# Altium PCB Controller-Board-Rev3.PcbDoc
Units mm, origin at the board's own origin, x right, y up, seen from the top; angles counter-clockwise.
Board outline 35 x 30 mm, 4 copper layers (Component Side, Ground Plane, Power Plane, Solder Side), stack 0.844 mm thick; 56 components, 57 nets, 246 pads, 90 vias.
Unrouted connection lines stored in the file: 3.
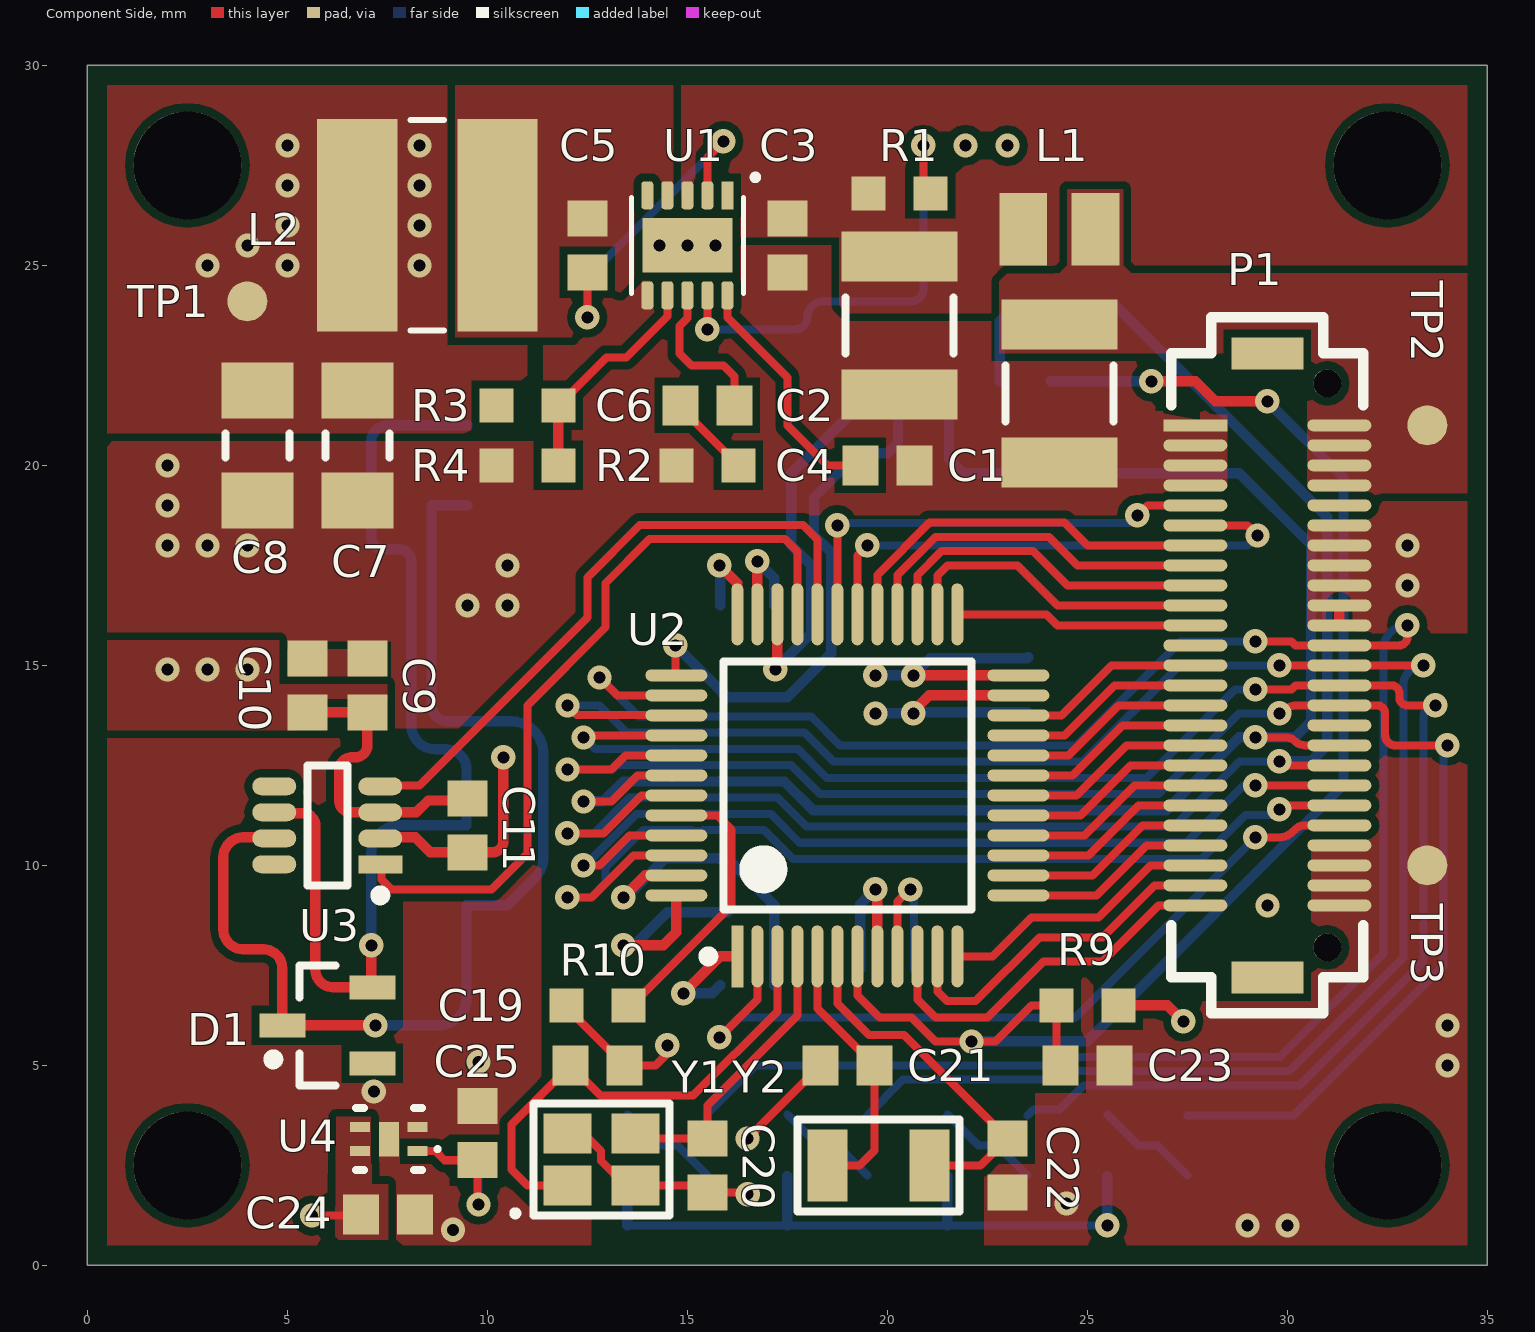
[diagram p0: Component Side view]
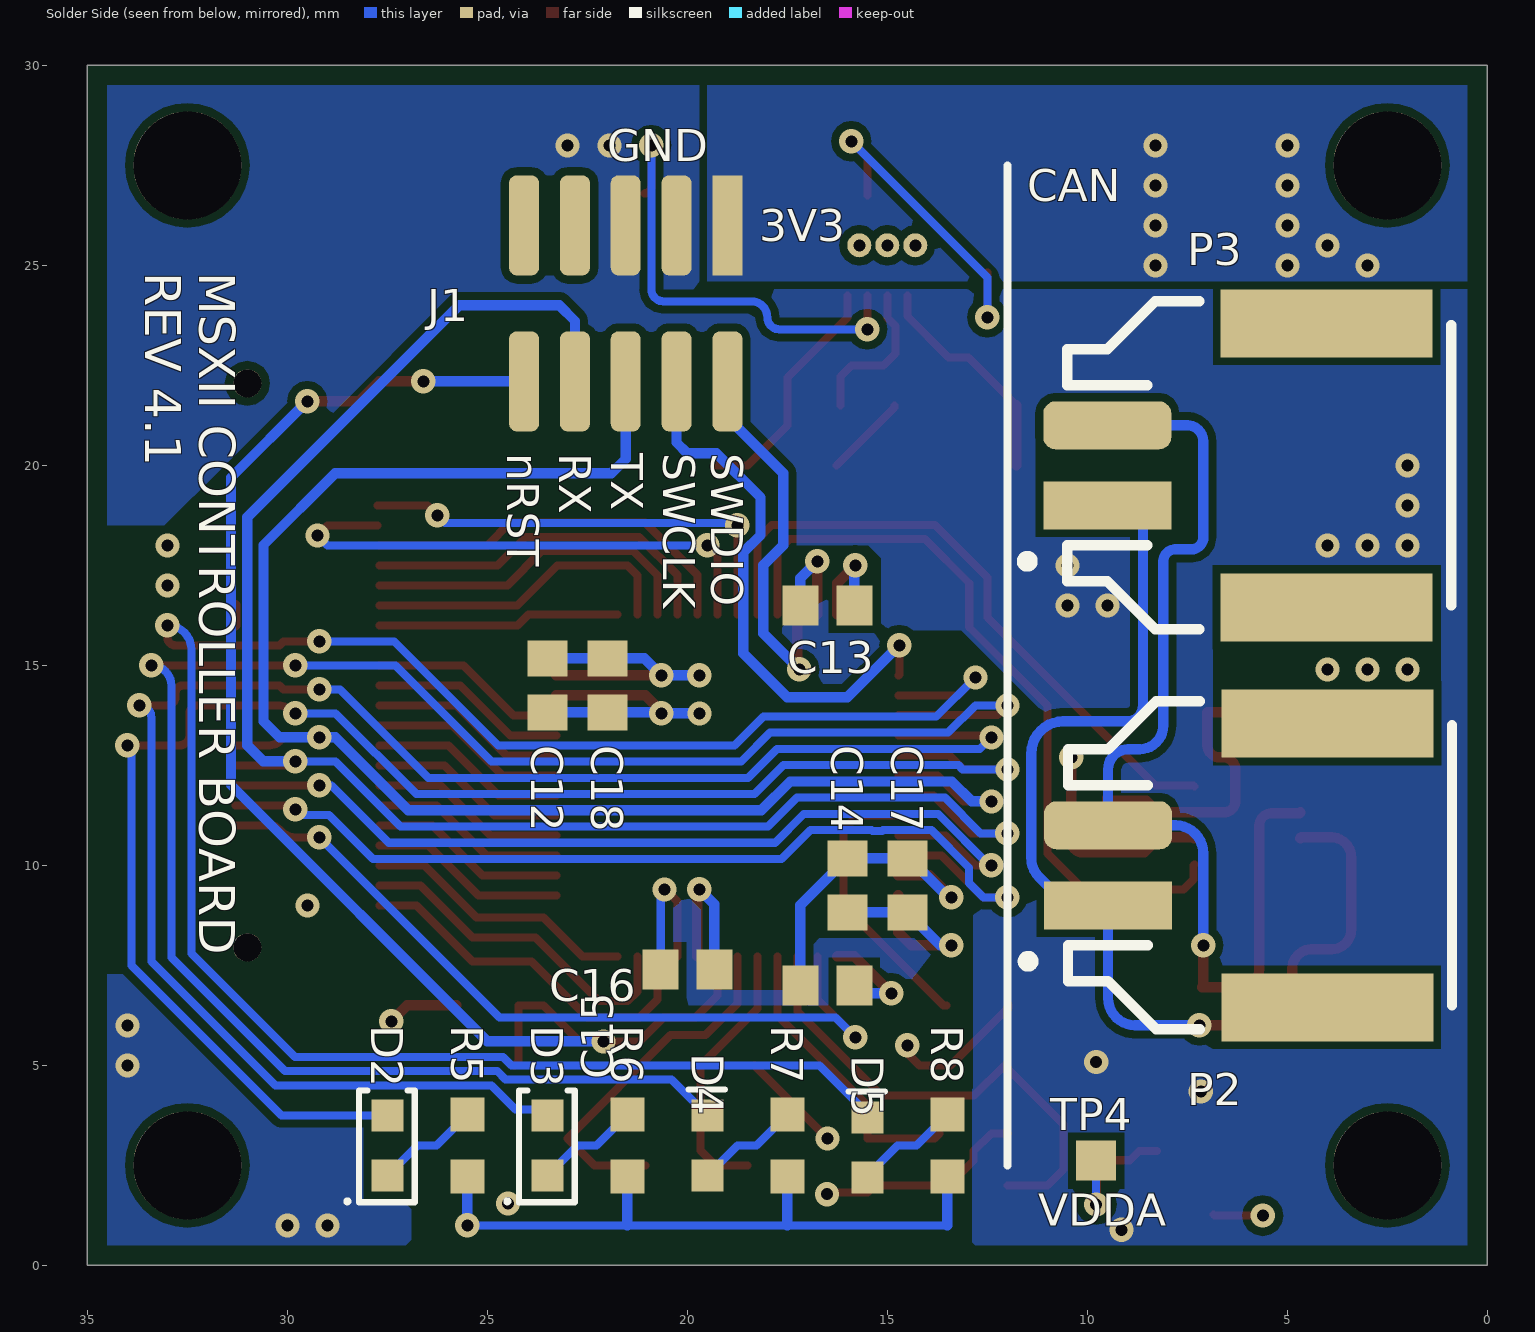
[diagram p1: Solder Side view, seen from below]
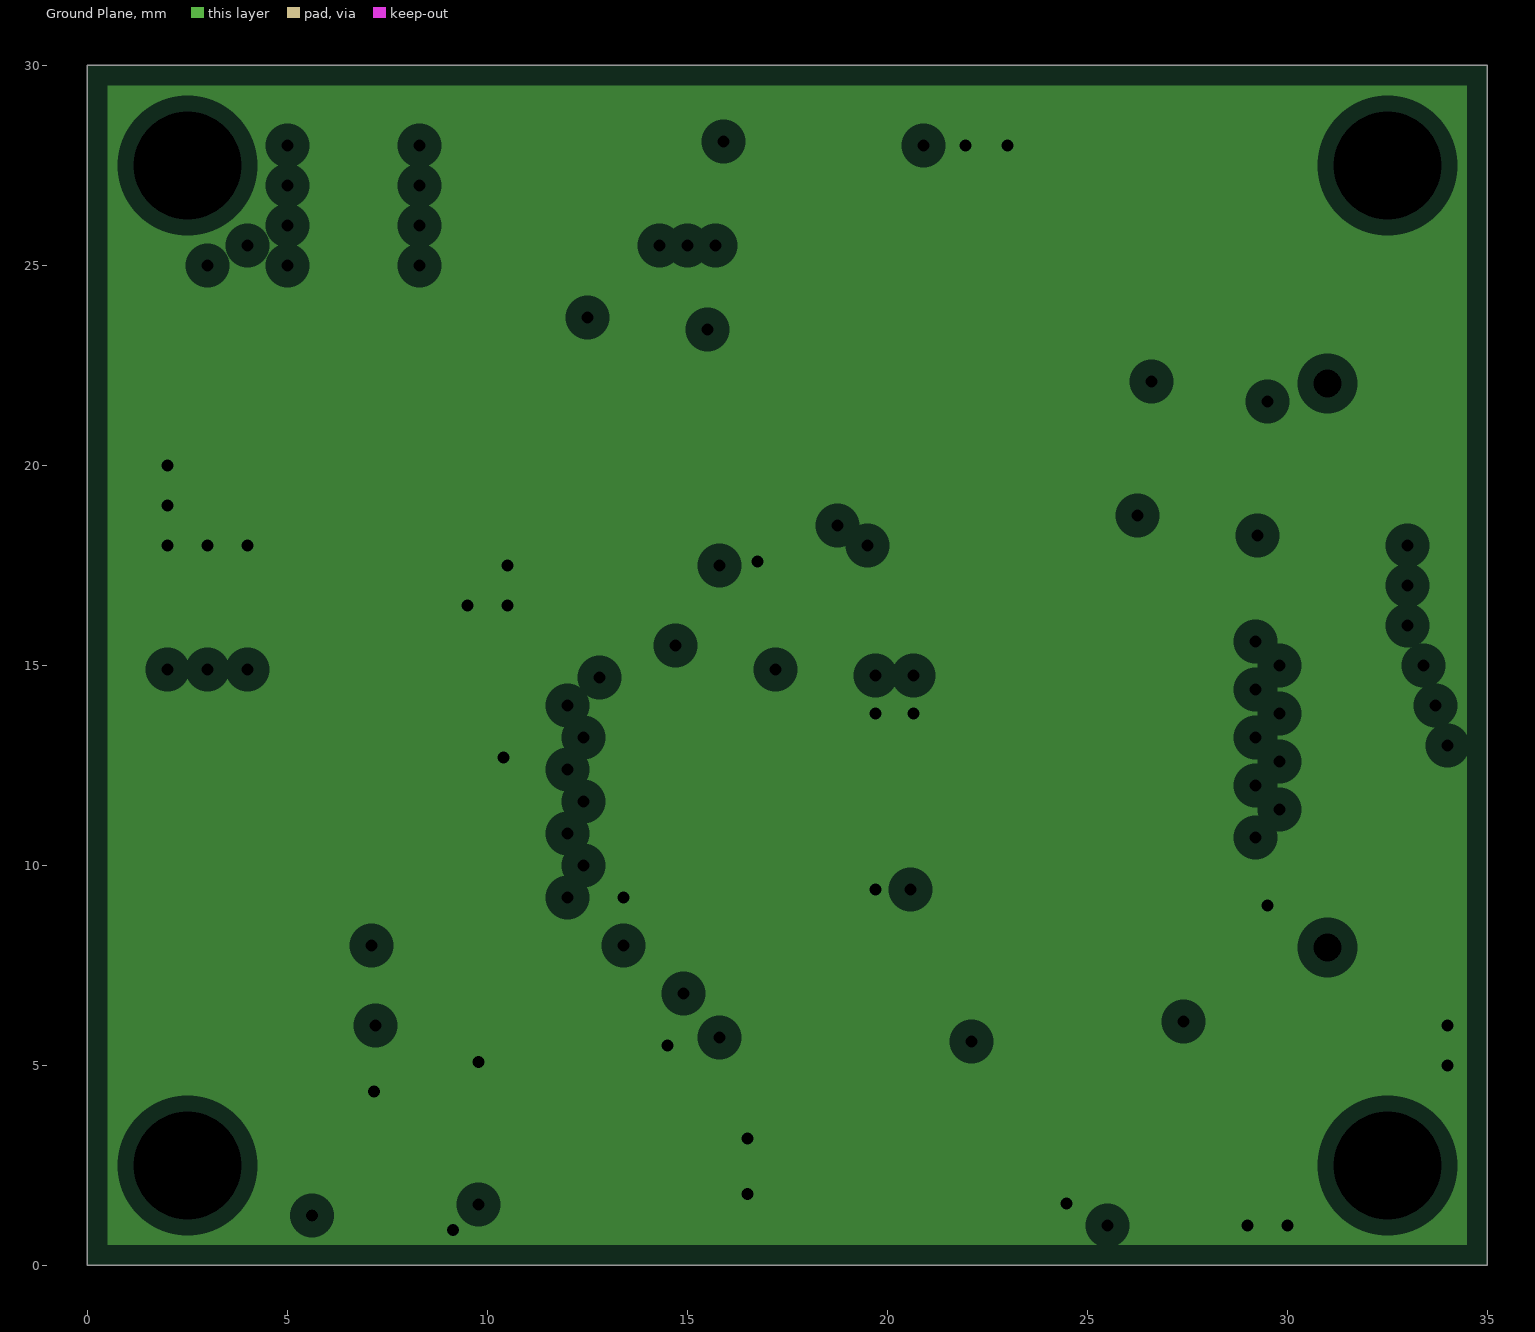
[diagram p2: Ground Plane, clearances drawn from the general rule]
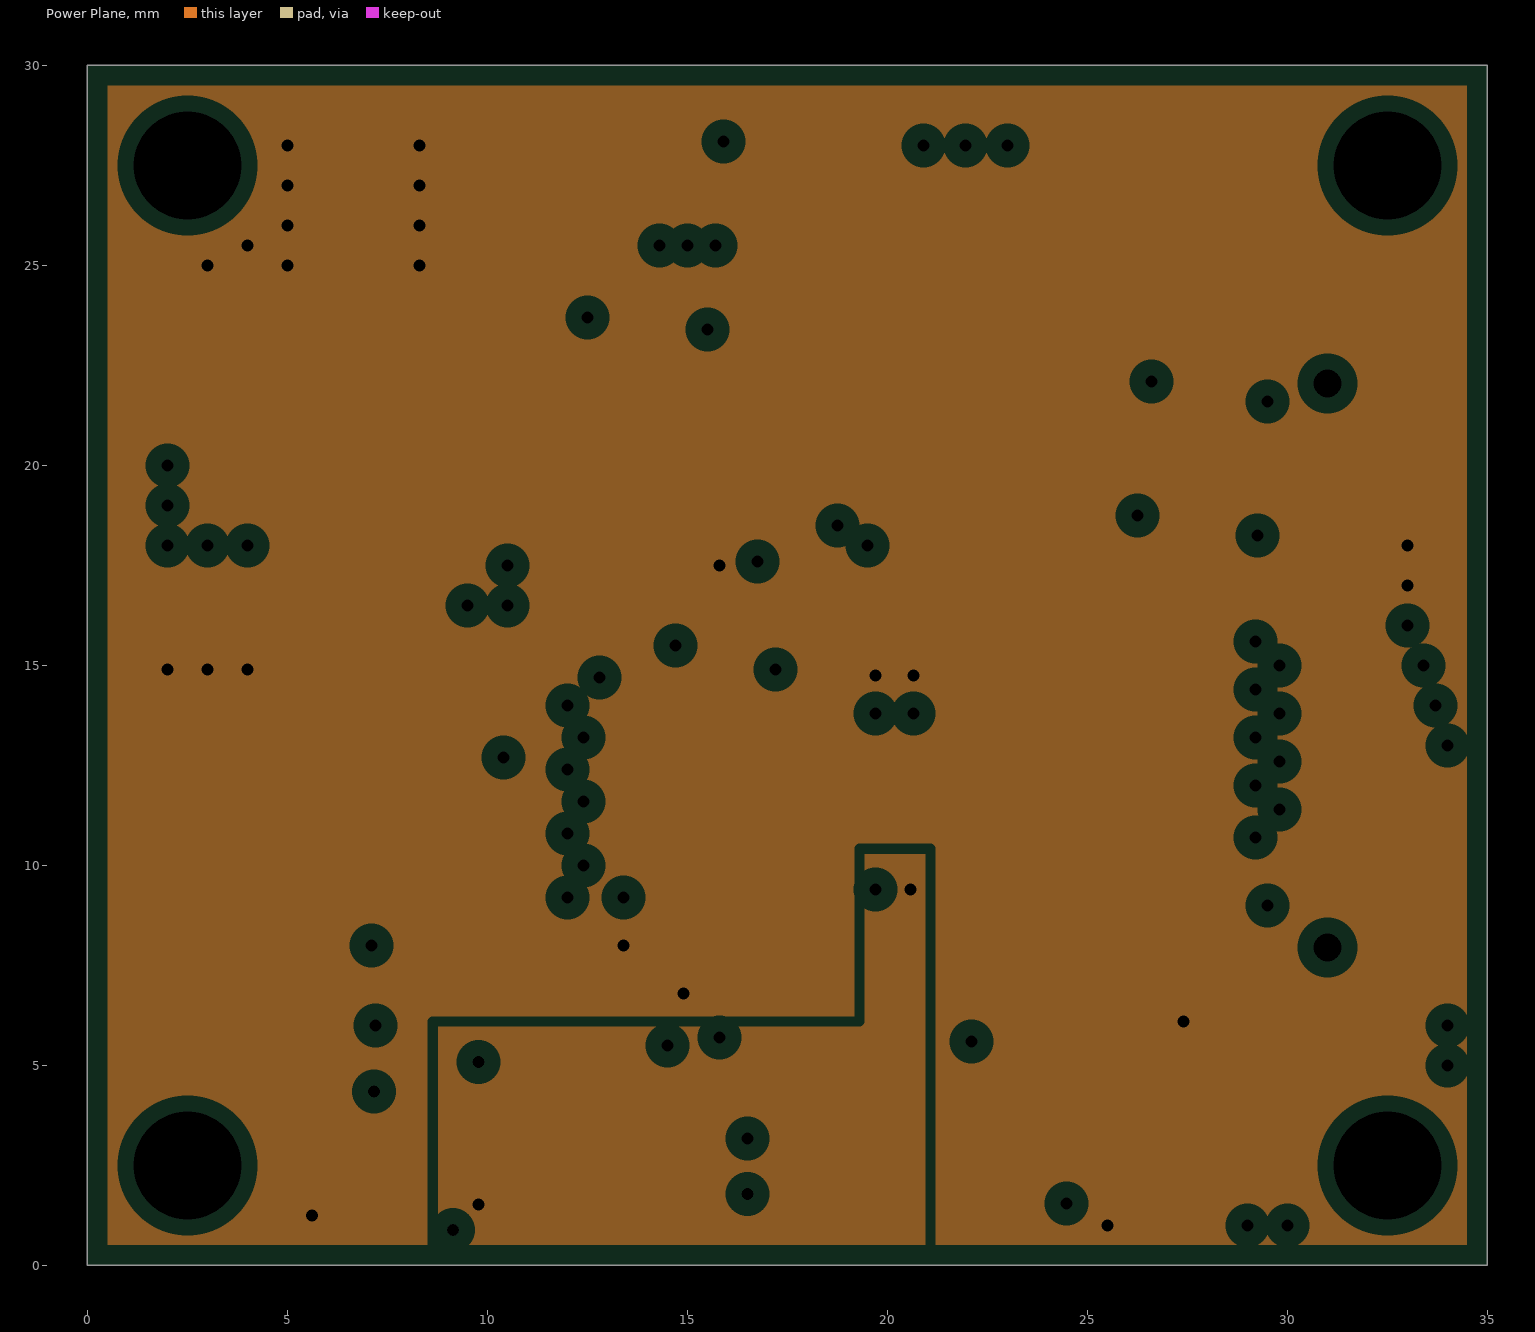
[diagram p3: Power Plane, clearances drawn from the general rule]
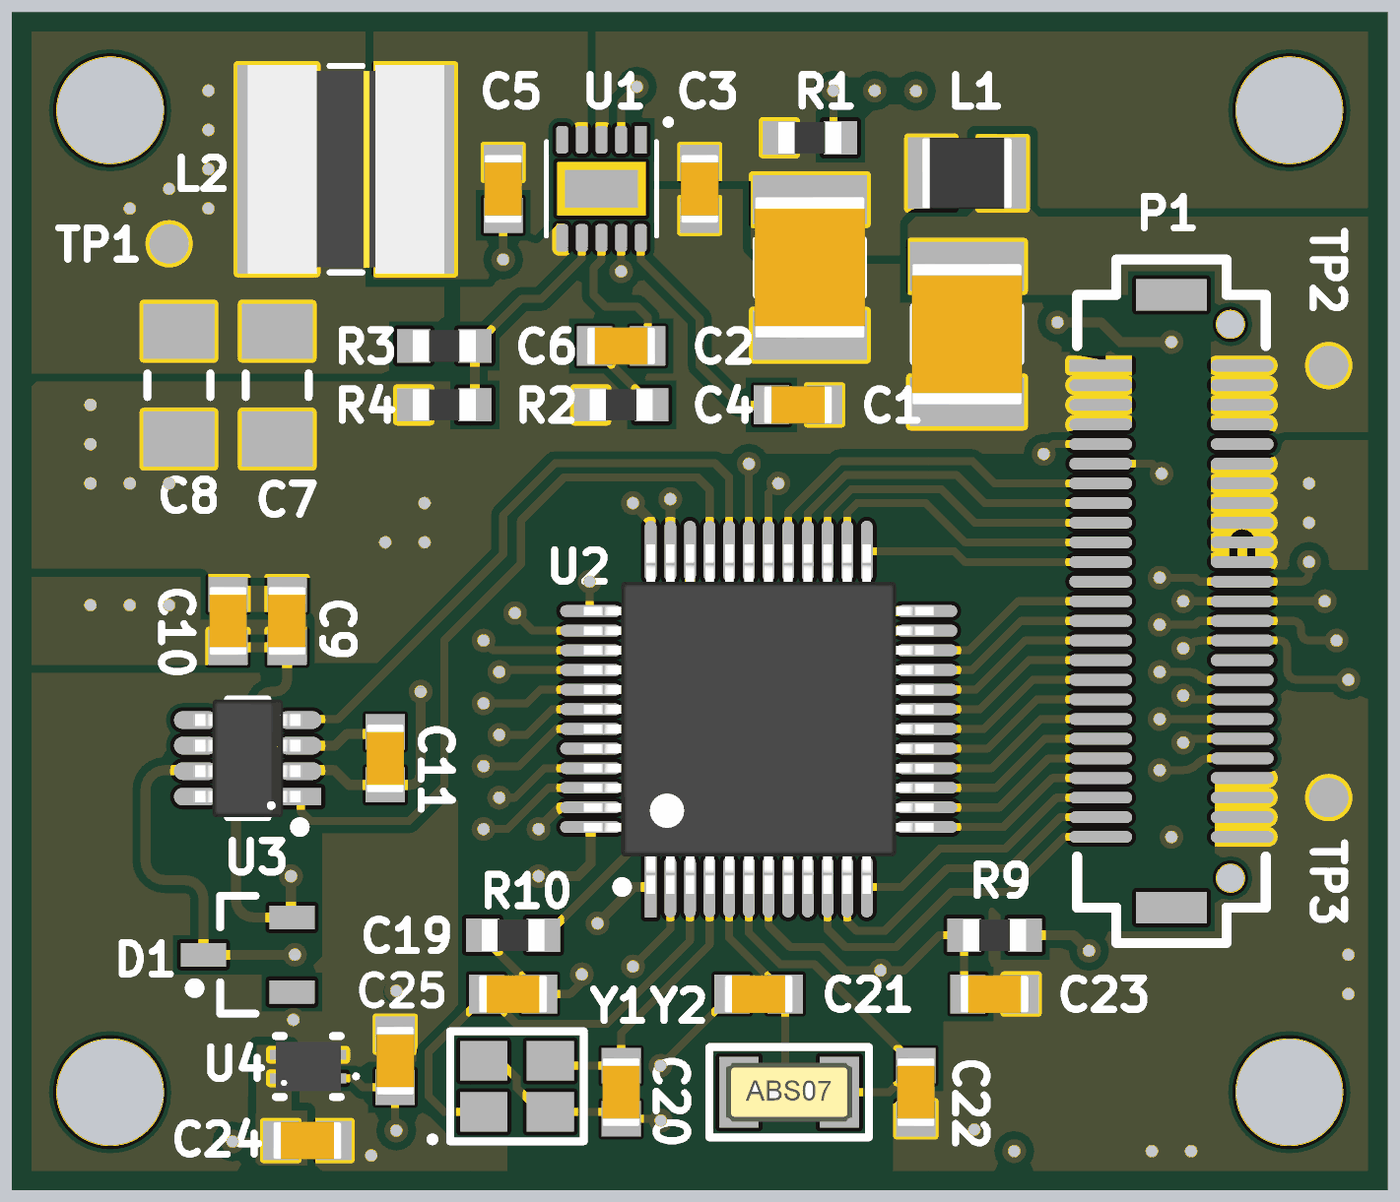
[diagram p4: 3D render of the assembled board from above, using the file's embedded part models]
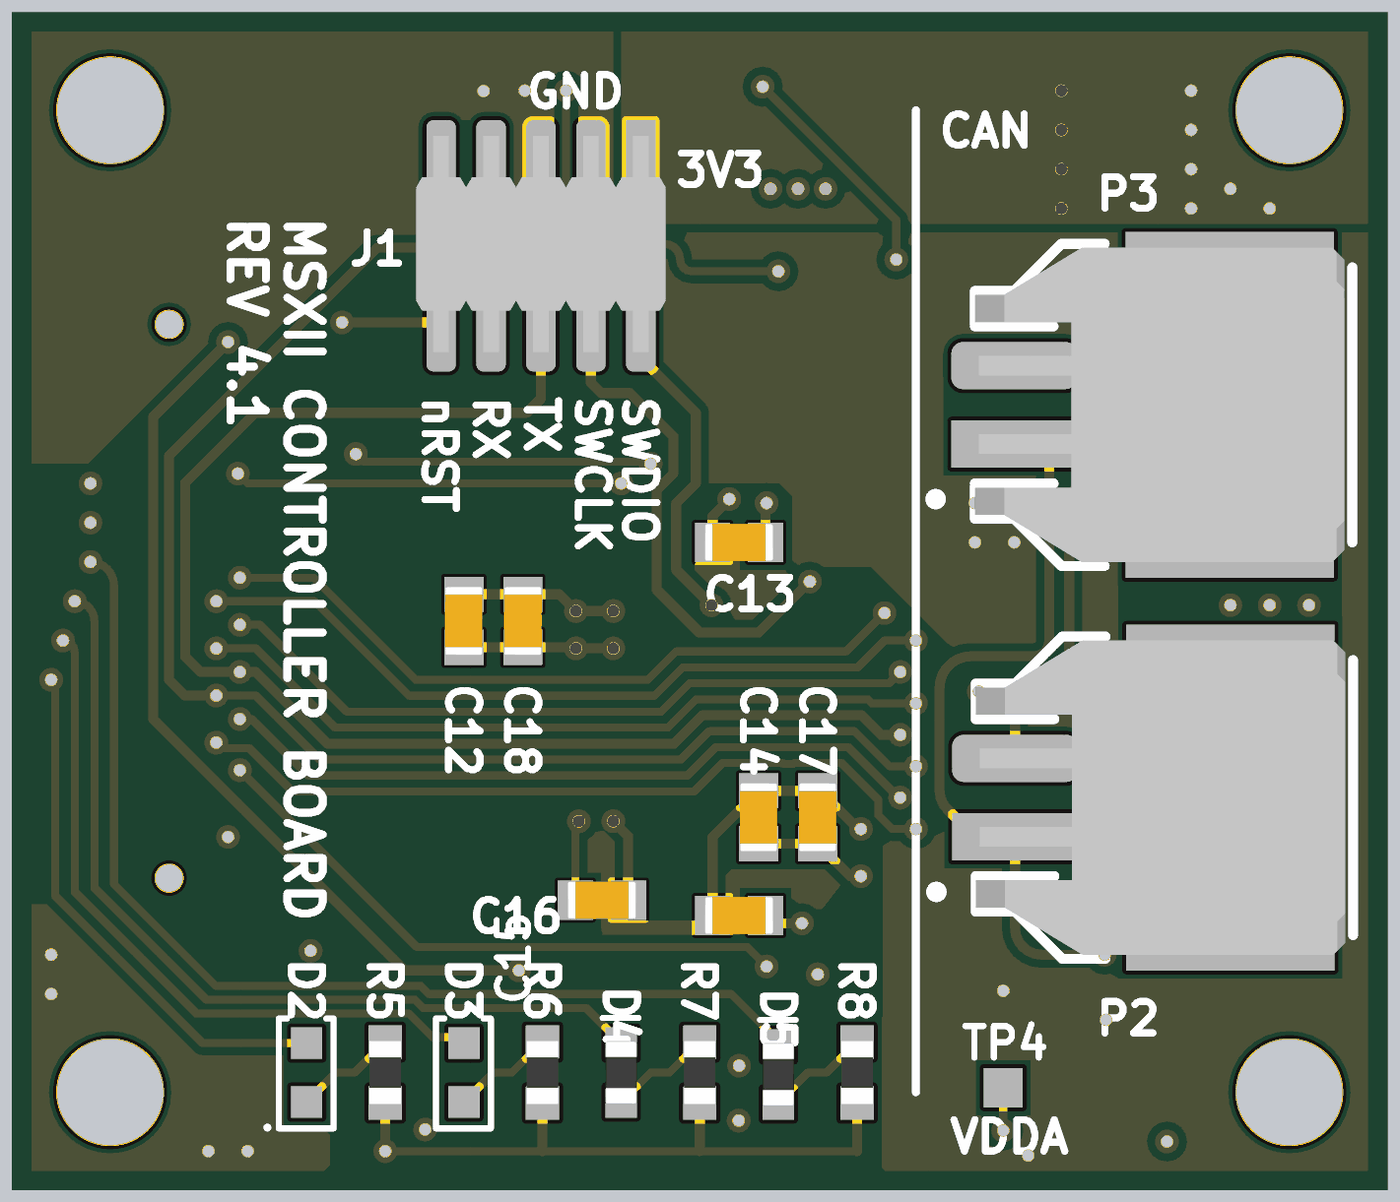
[diagram p5: 3D render of the assembled board from below, using the file's embedded part models]

## Layer stack, top to bottom
Top Solder: solder mask 0.0102, Solder Resist, Dk 3.5
Component Side: signal copper 0.0356
Dielectric 1: core 0.32, FR-4, Dk 4.8
Ground Plane: plane copper 0.036, net GND
Dielectric 3: prepreg 0.127, Dk 4.2
Power Plane: plane copper 0.036, net 3V3
Dielectric 4: core 0.254, Dk 4.2
Solder Side: signal copper 0.0356
Bottom Solder: solder mask 0.0102, Solder Resist, Dk 3.5

## Board outline
0,0 35,0 35,30 0,30

## Design rules (kind name [scope] priority, off if disabled: settings)
Clearance [All] p1: gap=0.152 except(0.2: Arc-Poly Track-Poly SMDPad-Poly THPad-Poly Via-Poly Fill-Poly Poly-Poly Poly-Region Poly-Text)
DiffPairsRouting [All] p1: maxlimit=0.254 minlimit=0.254 mostfreqgap=0.254 toplayer_minwidth=0.254 toplayer_maxwidth=0.381 toplayer_prefwidth=0.254 bottomlayer_minwidth=0.254 bottomlayer_maxwidth=0.381 bottomlayer_prefwidth=0.254 maxuncoupledlength=25
HoleSize [All] p1: absolutevalues=TRUE maxlimit=3 minlimit=0.025 maxpercent=80.000 minpercent=20.000
MinimumSolderMaskSliver [All] p1: minsoldermaskwidth=0
PlaneClearance [All] p1: clearance=0.4
PlaneConnect [All] p1: planeconnectstyle=Direct reliefexpansion=0 reliefentries=4 reliefconductorwidth=0.254 reliefairgap=0.254
PolygonConnect PolygonConnect_Relief [HasFootprint('RESC1608X06N') or HasFootprint('Bergstak 50 Pos Receptacle') or HasFootprint('CAPC1608X06N') or HasFootprint('10 POS 1.27MM RECT CONN')] p1: connectstyle=Relief reliefconductorwidth=0.254 reliefentries=4 polygonreliefangle="90 Angle" airgapwidth=0.2
PolygonConnect PolygonConnect_UFDFN [HasFootprint('10-UFDFN')] p2: connectstyle=Direct reliefconductorwidth=0.254 reliefentries=4 polygonreliefangle="90 Angle" airgapwidth=0.254
PolygonConnect PolygonConnect_Via [IsVia] p3: connectstyle=Direct reliefconductorwidth=0.254 reliefentries=4 polygonreliefangle="90 Angle" airgapwidth=0.254
PolygonConnect [All] p4: connectstyle=Direct reliefconductorwidth=0.254 reliefentries=4 polygonreliefangle="90 Angle" airgapwidth=0.254
RoutingVias [All] p1: holewidth=0.3 width=0.605 viastyle="Through Hole" minholewidth=0.3 minwidth=0.605 maxholewidth=6.3 maxwidth=6.605
SilkToSilkClearance [All] p1: silktosilkclearance=0.15
SilkToSolderMaskClearance [IsPad] p1: minsilkscreentomaskgap=0.15 clearancetoexposedcopper=TRUE
SolderMaskExpansion [All] p1: expansion=0.102
Width [All] p1: maxlimit=1.27 minlimit=0.152 preferedwidth=0.203
23 further rules are at their usual default settings.

## Classes and differential pairs
component class Controller_Board_Power_Supply: C1 C2 C3 C4 C5 C6 C7 C8 C24 C25 L1 L2 R1 R2 R3 R4 TP1 TP2 TP3 TP4 U1 U4 VIN
component class Controller_Board_Main: C9 C10 C11 C12 C13 C14 C15 C16 C17 C18 C19 C20 C21 C22 C23 D1 D2 D3 D4 D5 J1 P1 P2 P3 R5 R6 R7 R8 R9 R10 U2 U3 Y1 Y2
differential pair CAN: +CAN_P -CAN_N

## Components (designator, comment, footprint, x,y, rotation, side; value= is the part's Value field where it differs from the comment)
C1 "CAP CER 22UF 16V ±20% X5R 1210" "CAP, 1210" 24.3,21.8 r90 top
C2 "CAP CER 22UF 16V ±20% X5R 1210" "CAP, 1210" 20.3,23.5 r90 top
C3 "CAP CER 0.1UF 50V 10% X7R 0603" "CAP, 0603" 17.5,25.5 r90 top
C4 "CAP CER 0.1UF 50V 10% X7R 0603" "CAP, 0603" 20,20 r0 top
C5 "CAP CER 10nF 50V 5% X7R 0603" "CAP, 0603" 12.5,25.5 r90 top
C6 "CAP CER 6800pF 50V 10% X7R 0603" "CAP, 0603" 15.5,21.5 r0 top
C7 "CAP CER 22UF 6.3V ±10% X7R 1206" "CAP, 1206" 6.75,20.5 r90 top
C8 "CAP CER 22UF 6.3V ±10% X7R 1206" "CAP, 1206" 4.25,20.5 r90 top
C9 "CAP CER 10uF 25V 20% X5R 0603" "CAP, 0603" 7,14.5 r270 top
C10 "CAP CER 4.7UF 25V 10% X5R 0603" "CAP, 0603" 5.5,14.5 r270 top
C11 "CAP CER 0.1UF 50V 10% X7R 0603" "CAP, 0603" 9.5,11 r90 top
C12 "CAP CER 0.1UF 50V 10% X7R 0603" "CAP, 0603" 23.5,14.5 r90 bottom
C13 "CAP CER 0.1UF 50V 10% X7R 0603" "CAP, 0603" 16.5,16.5 r180 bottom
C14 "CAP CER 0.1UF 50V 10% X7R 0603" "CAP, 0603" 16,9.5 r270 bottom
C15 "CAP CER 0.1UF 50V 10% X7R 0603" "CAP, 0603" 19.99,7.391 r0 bottom
C16 "CAP CER 0.1UF 50V 10% X7R 0603" "CAP, 0603" 16.5,7 r180 bottom
C17 "CAP CER 4.7UF 25V 10% X5R 0603" "CAP, 0603" 14.5,9.5 r270 bottom
C18 "CAP CER 4.7UF 25V 10% X5R 0603" "CAP, 0603" 22,14.5 r90 bottom
C19 "CAP CER 15PF 50V ±5% NPO 0603" "CAP, 0603" 12.75,5 r180 top
C20 "CAP CER 15PF 50V ±5% NPO 0603" "CAP, 0603" 15.5,2.5 r90 top
C21 "CAP CER 15PF 50V ±5% NPO 0603" "CAP, 0603" 19,5 r0 top
C22 "CAP CER 15PF 50V ±5% NPO 0603" "CAP, 0603" 23,2.5 r90 top
C23 "CAP CER 0.1UF 50V 10% X7R 0603" "CAP, 0603" 25,5 r180 top
C24 "CAP CER 1UF 50V 10% X7R 0603" "CAP, 0603" 7.518,1.27 r0 top
C25 "CAP CER 1UF 50V 10% X7R 0603" "CAP, 0603" 9.754,3.302 r90 top
D1 "DIODE TVS 24VWM 70VC SOT23" SOT23 6,6 r180 top
D2 "LED BLUE CLEAR 2.8V 0603" DIOC1608X06N 27.5,3 r90 bottom
D3 "LED BLUE CLEAR 2.8V 0603" DIOC1608X06N 23.5,3 r90 bottom
D4 "LED GREEN CLEAR 2V 0603" LED_0603 19.49,2.3 r90 bottom
D5 "LED RED CLEAR 2V 0603" LED_0603 15.49,2.25 r90 bottom
J1 "CONN 10POS HEADR MALE 0.05\"" "CONN, 10POS 0.05\" Debug Header" 19,26 r0 bottom
L1 "IND 560nH 2.1A 20% 0806" INDC2116X06N 24.3,25.9 r180 top
L2 "15µH" IND_BOURNS_SRR40 8.5,26 r180 top
P1 "CONN 50POS Bergstak Receptacle 0.02\"" "CONN, Bergstak 50 Pos Receptacle" 29.5,15 r0 top
P2 "CONN 2POS DURA-CLIK 0.079\"" "CONN, 2POS Dura-Click" 9.48,9 r90 bottom
P3 "CONN 2POS DURA-CLIK 0.079\"" "CONN, 2POS Dura-Click" 9.5,19 r90 bottom
R1 "RES 100K OHM 5% 1/8W 0603" "RES, 0603" 20.3,26.8 r0 top
R2 "RES 6.8k OHM 1% 1/10W 0603" "RES, 0603" 15.5,20 r0 top
R3 "RES 26.1K OHM 1% 1/10W 0603" "RES, 0603" 11,21.5 r180 top
R4 "RES 10K OHM 1% 1/10W 0603" "RES, 0603" 11,20 r0 top
R5 "Value" "RES, 0603" 25.5,3 r90 bottom
R6 "Value" "RES, 0603" 21.5,3 r90 bottom
R7 "Value" "RES, 0603" 17.5,3 r90 bottom
R8 "Value" "RES, 0603" 13.5,3 r90 bottom
R9 "RES 100K OHM 5% 1/8W 0603" "RES, 0603" 25,6.5 r0 top
R10 "Value" "RES, 0603" 12.75,6.5 r0 top
TP1 "Test Point" "Test Point"#1 4,24.1 r90 top
TP2 "Test Point" "Test Point"#1 33.5,21 r90 top
TP3 "Test Point" "Test Point"#1 33.5,10 r90 top
TP4 "Test Point" "Test Point"#2 9.779,2.616 r90 bottom
U1 "IC REG BUCK ADJ 2A 10DFN" 10-UFDFN 15,25.5 r180 top
U2 "IC MCU 32BIT 128KB FLASH 48LQFP" TSQFP50P890X890X160-48M 19,12 r90 top
U3 "IC CAN Tranceiver TCAN332DR" TSOP65P280X145-8N 6,11 r180 top
U4 "IC REG LDO 3V 0.2A 4-TDFN" "IC REG LDO 3V 0.2A 4-TDFN" 8.255,3.404 r90 top
Y1 "CRYSTAL 32 MHz 8pF 4-SMD" "CX2520DB CRYSTAL" 12,2 r0 top
Y2 "CRYSTAL 32.768KHZ 9PF 2-SMD" "ABS07AIG CRYSTAL" 18.5,2.5 r0 top

## Footprints (in the part's own frame and the unit in brackets; to place one, negate y for a bottom-side part, rotate by r counter-clockwise, add the part's x,y. Pads: shape width x height; smd on the part's side, far side on the other; paste and mask are expansions set on the pad)
10-UFDFN [mm]
  rect 0.3x0.7 smd: 1(-1,-1.25)
  rrect50% 0.3x0.7 smd: 2(-0.5,-1.25) 3(0,-1.25) 4(0.5,-1.25) 5(1,-1.25) 6(1,1.25) 7(0.5,1.25) 8(0,1.25) 9(-0.5,1.25) 10(-1,1.25)
  round 0.6 hole 0.3: 11(-0.7,0) 11(0,0) 11(0.7,0)
  rect 2.25x1.36 smd paste-0.2: 11(0,0)
  silkscreen extent -1.77,-1.77 1.4,1.2, body extent -1.27,-1.27 1.28,1.28, height 0.6
"ABS07AIG CRYSTAL" [mm]
  rect 1x1.8 smd: 1(0,0) 2(2.55,0)
  silkscreen extent -0.75,-1.15 3.3,1.15, body extent -0.33,-0.75 2.88,0.75, height 0.89
"CAP, 0603" [mm] "Chip Capacitor, 2-Leads, Body 1.60x0.81mm, IPC Medium Density"
  rect 0.9x1 smd mask+0.076: 1(-0.675,0) 2(0.675,0)
  body extent -0.87,-0.48 0.87,0.48, height 0.9
"CAP, 1206" [mm] "Chip Capacitor, 2-Leads, Body 3.20x1.60mm, IPC Medium Density"
  rect 1.4x1.8 smd: 1(-1.375,0) 2(1.375,0)
  silkscreen extent -0.3,-0.8 0.3,0.8, body extent -1.68,-0.87 1.67,0.87, height 1.8
"CAP, 1210" [mm] "Chip Capacitor, 2-Leads, Body 3.20x2.50mm, IPC Low Density"
  rect 1.25x2.9 smd: 1(-1.725,0) 2(1.725,0)
  silkscreen extent -0.7,-1.35 0.7,1.35, body extent -1.8,-1.4 1.8,1.4, height 2.8
"CONN, 2POS Dura-Click" [mm] "WM7169CT-ND"
  rect 1.2x3.2 smd: 1(0,0)
  rrect50% 1.2x3.2 smd: 2(2,0)
  rect 1.7x5.3 smd: ""(-2.55,-5.48) ""(4.55,-5.48)
  silkscreen extent -3.1,-8.6 5.1,2.13, body extent -3,-8.4 5,1, height 6.39
"CONN, 10POS 0.05\" Debug Header" [mm] "Amphenol 10 Positions Header Connector 0.050\" (1.27mm) Surface Mount Gold"
  rect 0.75x2.5 smd: 1(0,0)
  rrect50% 0.75x2.5 smd: 2(0,3.9) 3(1.27,0) 4(1.27,3.9) 5(2.54,0) 6(2.54,3.9) 7(3.81,0) 8(3.81,3.9) 9(5.08,0) 10(5.08,3.9)
  body extent -0.64,-0.84 5.71,4.65, height 4.5
"CONN, Bergstak 50 Pos Receptacle" [mm] "Bergstak 50 Position Receptacle"
  rect 1.6x0.3 smd: 1(-1.8,6)
  oval 1.6x0.3 smd: 2(-1.8,5.5) 3(-1.8,5) 4(-1.8,4.5) 5(-1.8,4) 6(-1.8,3.5) 7(-1.8,3) 8(-1.8,2.5) 9(-1.8,2) 10(-1.8,1.5) 11(-1.8,1) 12(-1.8,0.5) 13(-1.8,0) 14(-1.8,-0.5) 15(-1.8,-1) 16(-1.8,-1.5) 17(-1.8,-2) 18(-1.8,-2.5) 19(-1.8,-3) 20(-1.8,-3.5) 21(-1.8,-4) 22(-1.8,-4.5) 23(-1.8,-5) 24(-1.8,-5.5) 25(-1.8,-6) 26(1.8,-6) 27(1.8,-5.5) 28(1.8,-5) 29(1.8,-4.5) 30(1.8,-4) 31(1.8,-3.5) 32(1.8,-3) 33(1.8,-2.5) 34(1.8,-2) 35(1.8,-1.5) 36(1.8,-1) 37(1.8,-0.5) 38(1.8,0) 39(1.8,0.5) 40(1.8,1) 41(1.8,1.5) 42(1.8,2) 43(1.8,2.5) 44(1.8,3) 45(1.8,3.5) 46(1.8,4) 47(1.8,4.5) 48(1.8,5) 49(1.8,5.5) 50(1.8,6)
  rect 1.8x0.8 smd: ""(0,-7.8) ""(0,7.8)
  round 0.7 hole 0.7: ""(1.5,-7.05) ""(1.5,7.05)
  silkscreen extent -2.4,-8.7 2.4,8.7
"CX2520DB CRYSTAL" [mm]
  rect 1.2x1 smd: 1(0,0) 2(1.7,0) 3(1.7,1.3) 4(0,1.3)
  silkscreen extent -1.35,-0.75 2.55,2.05, body extent -0.4,-0.35 2.1,1.65, height 0.5
DIOC1608X06N [mm] "Chip Diode, 2-Leads, Body 1.60x0.80mm, IPC Medium Density"
  rect 0.8x0.8 smd: 1(-0.75,0) 2(0.75,0)
  silkscreen extent -1.45,-0.69 1.38,1.05, body extent -0.8,-0.4 0.8,0.4, height 0.8
"IC REG LDO 3V 0.2A 4-TDFN" [mm] "QFN, 4-Leads, Body 1.20x1.60mm, Pitch 0.50mm/1.40mm, Thermal Pad 0.86x0.50mm, IPC Medium Density"
  rect 0.25x0.5 smd: 1(-0.55,0) 2(0.05,0) 3(0.05,1.44) 4(-0.55,1.44)
  rect 0.86x0.5 smd: 5(-0.25,0.715)
  silkscreen extent -1.02,-0.55 0.53,1.54, body extent -0.87,-0.11 0.38,1.54, height 0.6
IND_BOURNS_SRR40 [mil]
  rect 79x209 smd: 1(-69,0) 2(69,0)
  silkscreen extent -16,-104 16,103, body extent -99,-105 99,105, height 79
INDC2116X06N [mm] "Chip Inductor, 2-Leads, Body 2.10x1.60mm, IPC Medium Density"
  rect 1.19x1.82 smd: 1(-0.905,0) 2(0.905,0)
  body extent -1.15,-0.9 1.15,0.9, height 0.6
LED_0603 [mm]
  rect 0.8x0.8 smd: 1(-0.05,0.01) 2(1.45,0.01)
  silkscreen extent 2.09,-0.43 2.09,0.48, body extent -0.1,-0.39 1.5,0.41, height 0.55
"RES, 0603" [mm] "Chip Resistor, 2-Leads, Body 1.60x0.80mm, IPC Medium Density"
  rect 0.85x0.85 smd: 1(-0.775,0) 2(0.775,0)
  body extent -0.8,-0.4 0.8,0.4, height 0.55
SOT23 [mm] "SOT23, 3-Leads, Body 2.9x1.3mm, Pitch 0.95mm, Lead Span 2.3mm - Reverse Pinning, IPC Medium Density"
  rect 1.15x0.6 smd: 1(1.125,0) 2(-1.125,-0.95) 3(-1.125,0.95)
  silkscreen extent -0.2,-1.5 1.47,1.5, body extent -0.7,-1.5 0.7,1.5, height 1.1
"Test Point"#1 [mm]
  round 1 smd: TP(0,0)
"Test Point"#2 [mm]
  rect 1x1 smd: TP(0,0)
TSOP65P280X145-8N [mm] "TSOP, 8-Leads, Body 2.90x1.60mm, Pitch 0.65mm, IPC Medium Density"
  rect 1.1x0.45 smd: 1(-1.325,0.975)
  oval 1.1x0.45 smd: 2(-1.325,0.325) 3(-1.325,-0.325) 4(-1.325,-0.975) 5(1.325,-0.975) 6(1.325,-0.325) 7(1.325,0.325) 8(1.325,0.975)
  silkscreen extent -1.45,-1.5 0.5,1.87, body extent -1.39,-1.5 1.39,1.5, height 1.45
TSQFP50P890X890X160-48M [mm] "TSQFP, 48-Leads, Body 7.00x7.00mm, Pitch 0.50mm, IPC Low Density"
  rect 1.55x0.3 smd: 1(-4.275,2.75)
  oval 1.55x0.3 smd: 2(-4.275,2.25) 3(-4.275,1.75) 4(-4.275,1.25) 5(-4.275,0.75) 6(-4.275,0.25) 7(-4.275,-0.25) 8(-4.275,-0.75) 9(-4.275,-1.25) 10(-4.275,-1.75) 11(-4.275,-2.25) 12(-4.275,-2.75) 25(4.275,-2.75) 26(4.275,-2.25) 27(4.275,-1.75) 28(4.275,-1.25) 29(4.275,-0.75) 30(4.275,-0.25) 31(4.275,0.25) 32(4.275,0.75) 33(4.275,1.25) 34(4.275,1.75) 35(4.275,2.25) 36(4.275,2.75)
  oval 0.3x1.55 smd: 13(-2.75,-4.275) 14(-2.25,-4.275) 15(-1.75,-4.275) 16(-1.25,-4.275) 17(-0.75,-4.275) 18(-0.25,-4.275) 19(0.25,-4.275) 20(0.75,-4.275) 21(1.25,-4.275) 22(1.75,-4.275) 23(2.25,-4.275) 37(2.75,4.275) 38(2.25,4.275) 39(1.75,4.275) 40(1.25,4.275) 41(0.75,4.275) 42(0.25,4.275) 43(-0.25,4.275) 44(-0.75,4.275) 45(-1.25,4.275) 46(-1.75,4.275) 47(-2.25,4.275) 48(-2.75,4.275)
  oval 0.3x1.55 smd mask+0.102: 24(2.75,-4.275)
  silkscreen extent -4.4,-3.1 3.1,3.6, body extent -4.45,-4.45 4.45,4.45, height 1.6

## Part data
C1 C2: "22µF ±20% 16V Ceramic Capacitor X5R 1210 (3225 Metric)"
C3 C4 C11 C12 C13 C14 C15 C16 C23: "0.10µF ±10% 50V Ceramic Capacitor X7R 0603 (1608 Metric)"
C5: "10000pF ±5% 50V Ceramic Capacitor U2J 0603 (1608 Metric)"
C6: "6800pF ±10% 50V Ceramic Capacitor X7R 0603 (1608 Metric)"
C7 C8: "22µF ±10% 6.3V Ceramic Capacitor X7R 1206 (3216 Metric)"
C9: "10µF ±20% 25V Ceramic Capacitor X5R 0603 (1608 Metric)"
C10 C17 C18: "4.7µF ±10% 25V Ceramic Capacitor X5R 0603 (1608 Metric)"
C19 C20 C21 C22: "15pF ±5% 50V Ceramic Capacitor C0G, NP0 0603 (1608 Metric)"
C24 C25: "1µF ±10% 50V Ceramic Capacitor X7R 0603 (1608 Metric)"
D1: "TVS DIODE 24VWM 70VC SOT23"
D2 D3: "Blue 470nm LED Indication - Discrete 2.8V 0603 (1608 Metric)"
D4: "Green 572nm LED Indication - Discrete 2V 0603 (1608 Metric)"
D5: "Red 631nm LED Indication - Discrete 2V 0603 (1608 Metric)"
J1: "10 Positions Header Connector 0.050\" (1.27mm) Surface Mount Gold"
L1: "560nH Shielded Multilayer Inductor 2.1A 80 mOhm Max 0806 (2016 Metric)"
L2: library part "IND 15uH 1.03A 30% 1919", "15µH Shielded Wirewound Inductor 1.03A 220 mOhm Max 1919 (4848 Metric)"
P1: "50 Position Connector Receptacle, Center Strip Contacts Surface Mount Gold"
P2 P3: "2 Positions Header, Shrouded Connector 0.079\" (2.00mm) Surface Mount, Right Angle Tin"
R1 R9: "RES SMD 100K OHM 5% 1/10W 0603"
R2: "RES SMD 6.8K OHM 1% 1/10W 0603"
R3: "RES SMD 26.1K OHM 1% 1/10W 0603"
R4: "RES SMD 10K OHM 1% 1/10W 0603"
R5 R6 R7 R8 R10: library part "RES 510 OHM 5% 1/10W 0603", "RES SMD 510 OHM 5% 1/10W 0603"
U1: "Buck Switching Reg IC Positive Adjustable 0.925V 1 Output 2A 10-UFDFN Exposed Pad"
U2: "ARM® Cortex®-M0 STM32 F0 Microcontroller IC 32-Bit 48MHz 128KB (128K x 8) FLASH 48-LQFP (7x7)"
U3: "1/1 Transceiver CAN 8-SOIC"
Y1: "32MHz ±15ppm Crystal 8pF 50 Ohm -40°C ~ 85°C AEC-Q200 Surface Mount 4-SMD, No Lead"
Y2: "32.768kHz ±20ppm Crystal 6pF 50 kOhm -40°C ~ 85°C Surface Mount 4-SOJ, 5.50mm pitch"

## Free pads (board coordinates)
  round 2.7 hole 2.7: ""(2.5,2.5) ""(2.5,27.5) ""(32.5,2.5) ""(32.5,27.5)

## Via types
v1: diameter 0.605, hole 0.3, Component Side to Solder Side, tented both sides, 50 vias
v2: diameter 0.6, hole 0.3, Component Side to Solder Side, tented both sides, 40 vias

## Nets (pads, with @x,y where several pads share a name; then routed paths per layer and width w, separated by ;. In a path a pad name is that pad's centre, name@x,y a point inside that pad or via, vN(x,y) a via of type N, cw(c..) or ccw(c..) an arc to the next point about the centre after c; other vN are vias at no path point)
3V3: C7.2 C8.2 C9.2 C10.2 C11.2 C12.2 C13.2 C14.2 C16.2 C17.2 C18.2 C24.1 J1.1 L2.2 P1.40 P1.41 P1.42 P1.43 P1.44 P1.45 R5.1 R6.1 R7.1 R8.1 R9.2 TP1.TP U2.1 U2.24 U2.36 U2.48 U3.3 U4.3 U4.4 | length 45.4
  Component Side w0.203: v1(5.613,1.245) 6.818,1.245 C24.1
  Component Side w0.254: C10.2 C9.2 7,13 cw(c6.7,13) 6.7,12.7 6.6,12.7 ccw(c6.6,12.4) 6.3,12.4 6.3,11.6 ccw(c6.575,11.6) 6.575,11.325 U3.3 8.225,11.325 8.52,11.619 9.5,11.619 C11.2@9.5,11.675 ; v1(13.4,8) 14.4,8 14.725,8.325 U2.48 ; v1(14.9,6.8) 15.825,7.725 U2.1 ; v1(15.8,17.5) 16.25,17.05 U2.36 ; v1(20.65,14.75) U2.24 ; R9.2 27,6.5 v1(27.4,6.1) ; P1.40 P1.41
  Solder Side w0.203: 13.5,1 17.5,1 21.5,1 21.505,0.995 25.495,0.995 v1(25.5,1)
  Solder Side w0.254: v1(13.4,8) 13.675,8 C17.2 C14.2 ; 13.5,1 R8.1 ; v1(14.9,6.8) 15.625,6.8 C16.2 ; C13.2 v1@15.825,17.625 ; 17.5,1 R7.1 ; v1(19.7,14.75) v1(20.65,14.75) 21.075,15.175 C18.2 C12.2 C12.2@23.525,15.2 ; 21.5,1 R6.1 ; v1(25.5,1) R5.1
  other v2: 2,14.9 3,14.9 4,14.9 33,17 33,18 3,25 5,25 8.3,25 4,25.5 5,26 8.3,26 5,27 8.3,27 5,28 8.3,28
12V: C1.2 L1.1 P1.47 P1.48 P1.49 P1.50 TP2.TP
12V_IN: C2.2 C3.2 L1.2 R1.1 U1.3
BOOT0: R10.2 U2.44 | length 7
  Component Side w0.203: R10.2 13.6,6.5 16.1,9 16.1,10.9 15.75,11.25 U2.44
BST: C5.1 U1.2 | length 8.4
  Component Side w0.203: v1(12.5,23.7) C5.1 ; U1.2 15.5,27.7 v1(15.9,28.1)
  Solder Side w0.203: v1(12.5,23.7) 12.5,24.7 v1(15.9,28.1)
CAN_N: D1.2 P2.2 P3.2 U3.6 | length 26.5
  Component Side w0.254: U3.6 ccw(c4.7,11.325) 4.7,11.3 5.4,11.3 cw(c5.4,11) 5.7,11 5.7,7.4 ccw(c6.15,7.4) 6.15,6.95 D1.2 ; D1.2@7.1,6.975 v1(7.1,8)
  Solder Side w0.254: v1(7.1,8) 7.1,10.3 cw(c7.8,10.3) 7.8,11 P2.2 9.48,12.4 ccw(c8.98,12.4) 8.98,12.9 8.7,12.9 cw(c8.7,13.5) 8.1,13.5 8.1,17.6 ccw(c7.8,17.6) 7.8,17.9 7.4,17.9 cw(c7.4,18.2) 7.1,18.2 7.1,20.6 cw(c7.5,20.6) 7.5,21 P3.2
CAN_P: D1.1 P2.1 P3.1 U3.7 | length 28.7
  Component Side w0.254: U3.7 ccw(c4.65,10.675) 4.65,10.7 3.9,10.7 ccw(c3.9,10.2) 3.4,10.2 3.4,8.4 ccw(c3.9,8.4) 3.9,7.9 4.4,7.9 cw(c4.4,7.425) 4.875,7.425 D1.1 v1(7.2,6)
  Solder Side w0.254: v1(7.2,6) 8.8,6 ccw(c8.8,6.68) 9.48,6.68 P2.1 10.5,9 11.2,9.7 ccw(c10.717,10.183) 11.4,10.183 11.4,12.8 ccw(c10.6,12.8) 10.6,13.6 9,13.6 cw(c9,13.992) 8.608,13.992 8.608,19 P3.1
COMP: C6.2 U1.8 | length 3.9
  Component Side w0.203: U1.8 15,23.687 14.8,23.487 14.8,22.8 15.1,22.5 15.9,22.5 16.175,22.225 C6.2
EN: R1.2 U1.9 | length 11.7
  Component Side w0.203: v1(15.5,23.4) U1.9 ; v1(20.9,28) 20.9,26.975 ccw(c21.075,26.975) R1.2
  Solder Side w0.203: v1(15.5,23.4) 17.7,23.4 ccw(c17.7,23.7) 18,23.7 cw(c18.4,23.7) 18.4,24.1 20.6,24.1 ccw(c20.6,24.4) 20.9,24.4 v1(20.9,28)
FB: R3.1 R4.2 U1.7 | length 5.7
  Component Side w0.203: R3.1 12.975,22.7 13.472,22.7 14.5,23.728 U1.7
  Component Side w0.254: R4.2 R3.1
GND: C1.1 C2.1 C3.1 C4.2 C7.1 C8.1 C9.1 C10.1 C11.1 C12.1 C13.1 C14.1 C15.1 C16.1 C17.1 C18.1 C19.1 C20.1 C21.1 C22.1 C23.1 C24.2 C25.2 J1.3 J1.5 P1.1 P1.2 P1.3 P1.4 P1.26 P1.27 P1.28 P1.29 R2.1 R4.1 R10.1 TP3.TP U1.1 U1.5 U1.6 U2.8 U2.23 U2.35 U2.47 U3.2 U4.2 U4.5 Y1.2 Y1.4 | length 38.5
  Component Side w0.203: v1@9.754,5.055 v1(9.779,5.08) ; R10.1 11.975,6.45 C19.1 14.2,5 14.5,5.3 v1(14.5,5.5) ; Y1.4 12.4,3.3 12.846,2.854 12.846,2.613 13.459,2 Y1.2 15.325,2 15.5,1.825 16.463,1.825 v1(16.51,1.778) 16.51,1.952 v1@16.481,1.981 ; v2(16.5,3.175) C21.1
  Component Side w0.254: U3.2 7.35,10.7 8.2,10.7 8.575,10.325 10.125,10.325 ccw(c10.125,10.6) 10.4,10.6 v1(10.4,12.7) ; v1(13.4,9.2) 13.95,9.75 U2.47 ; U2.35 v1(16.75,17.6) ; v1(19.7,9.4) 19.75,9.35 U2.8 ; v1@20.6,13.8 21.05,14.25 U2.23
  Solder Side w0.254: v1(13.4,9.2) 13.475,9.2 14.475,10.2 C17.1 C14.1 17.175,9 C16.1 ; v1(16.75,17.6) 17.175,17.175 C13.1 ; C15.1@19.325,7.391 19.325,9.025 v1(19.7,9.4) ; v2(19.7,13.8) v1@20.6,13.8 ; v1(20.65,13.8) v1@20.6,13.8 ; C12.1 20.625,13.825 v1@20.6,13.8
  other v1: 9.144,0.889 7.163,4.343
  other v2: 29,1 30,1 24.486,1.549 34,5 34,6 29.5,9 9.5,16.5 10.5,16.5 10.5,17.5 2,18 3,18 4,18 2,19 2,20 23,27.99 21.951,28
NetC6_1: C6.1 R2.2 | length 2.1
  Component Side w0.203: C6.1 14.825,21.45 R2.2
NetD2_1: D2.1 R5.2 | length 2.6
  Solder Side w0.203: R5.2 26.275,3 26.75,3 D2.1
NetD3_1: D3.1 R6.2 | length 2.6
  Solder Side w0.203: R6.2 22.275,3 22.75,3 D3.1
NetD4_1: D4.1 R7.2 | length 2.6
  Solder Side w0.203: R7.2 18.275,3 18.75,3 D4.1
NetD5_1: D5.1 R8.2 | length 2.6
  Solder Side w0.203: R8.2 14.275,3 14.75,3 D5.1@15.5,2.25
NRST: C23.2 J1.10 R9.1 U2.7 | length 36.3
  Component Side w0.203: U2.7 19.25,6.75 19.8,6.2 20.6,6.2 21.2,5.6 v2(22.1,5.6) 22.7,5.6 23.6,6.5 R9.1 24.225,5.1 C23.2
  Component Side w0.254: v1(26.6,22.1) 27.7,22.1 28.2,21.6 v1(29.5,21.6)
  Solder Side w0.254: v2(22.1,5.6) 25,5.6 31.406,12.006 31.406,19.694 v1(29.5,21.6) ; J1.10 v1(26.6,22.1)
PA0: P1.25 U2.10 | length 9.4
  Component Side w0.203: U2.10 20.75,6.65 21.2,6.2 22.5,6.2 23.9,7.6 25.375,7.6 26.775,9 P1.25
PA1: P1.24 U2.11 | length 8.6
  Component Side w0.203: U2.11 21.25,6.85 21.492,6.608 22.208,6.608 23.8,8.2 25.375,8.2 26.675,9.5 P1.24
PA2/USART2_TX: P1.23 U2.12 | length 6.9
  Component Side w0.203: U2.12 22.625,7.725 23.6,8.7 25.275,8.7 26.575,10 P1.23
PA3/USART2_RX: P1.22 U2.13 | length 4.9
  Component Side w0.203: U2.13 25.225,9.25 26.475,10.5 P1.22
PA4/SPI1_NSS: P1.21 U2.14 | length 4.9
  Component Side w0.203: U2.14 25.125,9.75 26.375,11 P1.21
PA5/SPI1_SCK: P1.20 U2.15 | length 4.9
  Component Side w0.203: U2.15 25.025,10.25 26.275,11.5 P1.20
PA6/SPI1_MISO: P1.19 U2.16 | length 4.9
  Component Side w0.203: U2.16 24.925,10.75 26.175,12 P1.19
PA7/SPI1_MOSI: P1.18 U2.17 | length 4.9
  Component Side w0.203: U2.17 24.825,11.25 26.075,12.5 P1.18
PA8: P1.7 U2.29 | length 9.7
  Component Side w0.203: U2.29 19.75,17.258 21.058,18.566 24.434,18.566 25,18 P1.7
PA9: P1.6 U2.30 | length 13.3
  Component Side w0.203: U2.30 19.25,17.75 v1(19.5,18) ; P1.6@27.75,18.5 29,18.5 v2(29.25,18.25)
  Solder Side w0.203: v1(19.5,18) 29,18 v2(29.25,18.25)
PA10: P1.5 U2.31 | length 11.4
  Component Side w0.203: U2.31 v1(18.75,18.5) ; v1(26.25,18.75) 26.5,19 P1.5@27.75,19
  Solder Side w0.203: v1(18.75,18.5) 18.806,18.556 26.056,18.556 v1(26.25,18.75)
PA11/CAN_RX: U2.32 U3.4 | length 16.2
  Component Side w0.203: U3.4 7.35,12 8.3,12 12.5,16.2 12.5,17.2 13.812,18.512 17.888,18.512 18.25,18.15 U2.32
PA12/CAN_TX: U2.33 U3.1 | length 19
  Component Side w0.203: U3.1 7.35,10 7.35,9.65 7.6,9.4 10.1,9.4 11,10.3 11,14 12.951,15.951 12.951,17.051 14.056,18.156 17.444,18.156 17.75,17.85 U2.33
PA13/SWDIO: J1.2 U2.34 | length 9.8
  Component Side w0.254: v1(17.2,14.9) 17.25,14.95 U2.34
  Solder Side w0.254: v1(17.2,14.9) 18.1,15.8 18.1,17.5 17.6,18 17.6,19.8 19,21.2 J1.2
PA14/SWCLK: J1.4 U2.37 | length 13.9
  Component Side w0.203: v1(14.7,15.5) 14.7,14.775 U2.37
  Solder Side w0.254: v1(14.7,15.5) 16,14.2 17.5,14.2 18.6,15.3 18.6,17.827 18.168,18.259 18.168,19.194 19.274,20.3 20,20.3 20.27,20.57 J1.4
PA15: D5.2 P1.39 U2.38 | length 51.7
  Component Side w0.203: v2(12.8,14.7) 13.25,14.25 U2.38 ; v1(29.2,15.6) 30.1,15.6 30.2,15.5 P1.39 32.8,15.5 ccw(c32.8,15.7) 33,15.7 v1(33,16)
  Solder Side w0.203: v2(12.8,14.7) 13.778,13.722 18.099,13.722 18.821,13 24.726,13 27.326,15.6 v1(29.2,15.6) ; D5.2 15.5,3.8 16.7,5 24.395,5 24.606,5.21 29.81,5.21 32.4,7.8 32.4,15.4 cw(c33,15.4) v1(33,16)
PB0: P1.17 U2.18 | length 4.9
  Component Side w0.203: U2.18 24.725,11.75 25.975,13 P1.17
PB1: P1.16 U2.19 | length 4.9
  Component Side w0.203: U2.19 24.625,12.25 25.875,13.5 P1.16
PB2: P1.15 U2.20 | length 4.9
  Component Side w0.203: U2.20 24.525,12.75 25.775,14 P1.15
PB3: D4.2 P1.38 U2.39 | length 48.4
  Component Side w0.203: v2(12,14) 12.246,13.754 14.725,13.754 U2.39 ; v1(29.8,15) P1.38 v1(33.4,15)
  Solder Side w0.203: v2(12,14) 12.8,14 13.484,13.316 17.931,13.316 18.653,12.594 24.894,12.594 27.3,15 v1(29.8,15) ; D4.2 20.395,4.645 24.542,4.645 24.753,4.855 30.055,4.855 32.9,7.7 32.9,14.5 cw(c33.4,14.5) v1(33.4,15)
PB4: D3.2 P1.37 U2.40 | length 43.4
  Component Side w0.203: v2(12.4,13.2) 12.45,13.25 U2.40 ; v1(29.2,14.4) 30.1,14.4 30.2,14.5 32.6,14.5 cw(c32.6,14.3) 32.8,14.3 32.8,14.2 ccw(c33,14.2) 33,14 v1(33.7,14)
  Solder Side w0.203: v2(12.4,13.2) 12.69,12.91 17.762,12.91 18.485,12.188 26.475,12.188 28.688,14.4 v1(29.2,14.4) ; D3.2 23.65,3.9 24.3,3.9 24.9,4.5 30.3,4.5 33.4,7.6 33.4,13.7 cw(c33.7,13.7) v1(33.7,14)
PB5: D2.2 P1.36 U2.41 | length 40.5
  Component Side w0.203: v2(12,12.4) 13.1,12.4 13.45,12.75 U2.41 U2.41@14.675,12.8 ; v1(29.8,13.8) cw(c30.283,13.317) 30.283,14 32.244,14 cw(c32.244,13.8) 32.444,13.8 32.444,13.256 ccw(c32.7,13.256) 32.7,13 v1(34,13)
  Solder Side w0.203: v2(12,12.4) 13.118,12.4 13.222,12.504 17.594,12.504 18.316,11.781 26.775,11.781 28.794,13.8 v1(29.8,13.8) ; D2.2 30.15,3.75 33.9,7.5 33.9,12.9 v1(34,13)
PB6/USART1_TX: J1.6 P1.34 U2.42 | length 40.8
  Component Side w0.203: v2(12.4,11.6) 13.1,11.6 13.75,12.25 U2.42 cw(c14.604,12.371) U2.42@14.604,12.2 ; v1(29.2,13.2) 29.959,13.2 cw(c29.959,12.859) 30.2,13.1 ccw(c30.441,13.341) 30.441,13 P1.34
  Solder Side w0.254: v2(12.4,11.6) 12.892,11.6 13.39,12.098 17.426,12.098 18.148,11.375 26.975,11.375 28.8,13.2 v1(29.2,13.2) 30.194,13.2 30.594,13.6 30.594,18.006 28.8,19.8 21.9,19.8 21.54,20.16 J1.6
PB7/USART1_RX: J1.8 P1.33 U2.43 | length 42.9
  Component Side w0.203: v1(12,10.8) 12.9,10.8 13.85,11.75 U2.43 ; v1(29.8,12.6) 29.9,12.5 P1.33
  Solder Side w0.203: v1(12,10.8) 12.667,10.8 13.558,11.691 17.258,11.691 17.98,10.969 27.169,10.969 28.8,12.6 v1(29.8,12.6)
  Solder Side w0.254: J1.8 22.81,23.61 23.2,24 25.7,24 31,18.7 31,13 30.6,12.6 v1(29.8,12.6)
PB8/I2C1_SCL: P1.32 U2.45 | length 23
  Component Side w0.203: v1(12.4,10) 12.8,10 13.55,10.75 U2.45 ; v1(29.2,12) P1.32
  Solder Side w0.203: v1(12.4,10) 12.441,10 13.727,11.285 17.089,11.285 17.812,10.563 27.463,10.563 28.9,12 v1(29.2,12)
PB9/I2C1_SDA: P1.31 U2.46 | length 24.3
  Component Side w0.203: v1(12,9.2) 12.6,9.2 13.65,10.25 U2.46 ; v1(29.8,11.4) 29.9,11.5 P1.31
  Solder Side w0.203: v1(12,9.2) 12.6,9.2 12.956,9.556 12.956,9.941 13.895,10.879 15.105,10.879 15.128,10.857 15.372,10.857 15.395,10.879 16.921,10.879 17.643,10.157 27.857,10.157 28.956,11.256 29.656,11.256 v1(29.8,11.4)
PB10/USART3_TX/I2C2_SCL: P1.14 U2.21 | length 4.9
  Component Side w0.203: U2.21 24.427,13.25 25.677,14.5 P1.14
PB11/USART3_RX/I2C2_SDA: P1.13 U2.22 | length 4.9
  Component Side w0.203: U2.22 24.35,13.75 25.6,15 P1.13
PB12/SPI2_NSS: P1.11 U2.25 | length 6.1
  Component Side w0.203: U2.25 23.975,16.275 24.25,16 P1.11
PB13/SPI2_SCK: P1.10 U2.26 | length 7.9
  Component Side w0.203: U2.26 21.25,17.25 21.5,17.5 23.253,17.5 24.253,16.5 P1.10
PB14/SPI2_MISO: P1.9 U2.27 | length 8.5
  Component Side w0.203: U2.27 20.75,17.253 21.353,17.855 23.645,17.855 24.5,17 P1.9
PB15/SPI2_MOSI: P1.8 U2.28 | length 9.1
  Component Side w0.203: U2.28 20.25,17.255 21.206,18.211 24.039,18.211 24.75,17.5 P1.8
PC13: P1.30 U2.2 | length 20.1
  Component Side w0.203: v1(15.8,5.7) 16.75,6.65 U2.2 ; v1(29.2,10.7) 29.8,10.7 ccw(c29.8,11.183) 30.141,10.841 30.2,10.9 cw(c30.442,10.659) 30.442,11 P1.30
  Solder Side w0.203: v1(15.8,5.7) 16.3,6.2 24.7,6.2 v1(29.2,10.7)
PC14/OSC32_IN: C19.2 U2.3 Y1.1 | length 12.5
  Component Side w0.203: Y1.1 11,2 10.6,2.4 10.6,3.525 C19.2 12.829,4.246 15.146,4.246 17.25,6.35 U2.3
PC15/OSC32_OUT: C20.2 U2.4 Y1.3 | length 7.3
  Component Side w0.203: Y1.3 13.825,3.175 15.5,3.175 15.5,4 17.75,6.25 U2.4
PF0/OSC_IN: C21.2 U2.5 Y2.1 | length 6.8
  Component Side w0.203: U2.5 18.25,6.425 C21.2 19.675,2.875 19.3,2.5 Y2.1
PF1/OSC_OUT: C22.2 U2.6 Y2.2 | length 9.1
  Component Side w0.203: U2.6 18.75,6.55 19.546,5.754 20.421,5.754 C22.2 22.325,2.5 Y2.2
SS: C4.1 U1.10 | length 6.1
  Component Side w0.203: U1.10 16,23.7 17.5,22.2 17.5,21 18.5,20 C4.1
SW: C5.2 L2.1 U1.4
VDDA: C15.2 C25.1 TP4.TP U2.9 U4.1 | length 7.7
  Component Side w0.203: U4.1 8.703,2.854 8.93,2.627 C25.1 9.754,1.549 v1(9.779,1.524) ; U2.9 20.25,9.099 v1@20.574,9.423
  Solder Side w0.203: v1(9.779,1.524) TP4.TP ; v1(20.574,9.398) 20.665,9.307 C15.2
pads on no net: D1.3 J1.7 J1.9 P1. P1.12 P1.35 P1.46 P2. P3. R3.2 U1.11 U3.5 U3.8

## Polygon pours and split planes (outlines as drawn)
3V3 on Component Side "3V3_L01_P034" (solid, pour order 34): 6.223,3.708 7.112,3.708 7.112,2.032 7.518,2.032 7.518,0.635 6.198,0.635
3V3 on Component Side "3V3_Bergstak" (solid, pour order 35): 30.5,19.1 34.5,19.1 34.5,15.8 30.5,15.8
GND on Component Side "TOP_GND_MAIN" (solid, remove dead copper, pour order 42): 0.5,29.5 34.5,29.5 34.5,0.5 0.5,0.5
GND on Component Side "TOP_GND_1" (solid, pour order 41): 28.5,22.6 22.6,22.6 22.6,23.7 19,23.7 18.6,24.1 18.6,25.5 16.7,25.5 16.7,27.189 11.4,27.189 11.4,20.6 0.5,20.6 0.5,15.6 7.6,15.6 7.6,13.424 9.324,13.424 14.65,18.75 26.25,18.75 26.75,19.25 28.5,19.25
12V_IN on Component Side "12V_IN" (solid, pour order 40): 34.5,23.8 19,23.8 18.8,24 18.8,25.7 14.8,25.7 14.8,29.5 34.5,29.5
12V on Component Side "12V" (solid, pour order 38): 34.5,19.25 30.5,19.25 30.5,22.8 22.8,22.8 22.8,24.6 23,24.8 24.3,24.8 24.5,25 24.5,26.9 25.9,26.9 25.9,25 26.1,24.8 34.5,24.8
3V3 on Component Side "3V3_TOP" (solid, pour order 39): 0.5,29.5 9,29.5 9,23 11,23 11,20.8 0.5,20.8
SW on Component Side "SW" (solid, pour order 37): 14.65,26.4 14.65,29.5 9.2,29.5 9.2,23.2 12.2,23.2 14.5,25.5 14.5,26.4
3V3 on Component Side "3V3_TOP_1" (solid, pour order 36): 7.5,13.375 0.5,13.375 0.5,15.625 7.5,15.625
GND on Solder Side "GND_BOTTOM" (solid, remove dead copper, pour order 44): 0.5,29.5 34.5,29.5 34.5,0.5 0.5,0.5
3V3 on Solder Side "3V3_Bottom" (solid, pour order 43): 0.5,29.5 19.5,29.5 19.5,24.6 0.5,24.6
GND on Ground Plane (split plane): 34.49,0.51 0.51,0.51 0.51,29.49 34.49,29.49
VDDA on Power Plane (split plane): 20.953,0.51 8.765,0.51 8.765,5.967 19.304,5.967 19.354,5.976 19.396,6.004 19.424,6.046 19.433,6.096 19.433,10.285 20.953,10.285
3V3 on Power Plane (split plane): 34.49,0.51 21.211,0.51 21.211,10.414 21.202,10.464 21.174,10.506 21.132,10.534 21.082,10.543 19.304,10.543 19.254,10.534 19.212,10.506 19.184,10.464 19.175,10.414 19.175,6.225 8.636,6.225 8.586,6.216 8.544,6.188 8.516,6.146 8.507,6.096 8.507,0.51 0.51,0.51 0.51,29.49 34.49,29.49

## Other copper
Component Side:
  pour cut-out: 15.5,15.5 22.5,15.5 22.5,8.5 15.5,8.5
  pour cut-out: 22,16.5 27,16.5 27,14.5 22,14.5
  pour cut-out: 14.184,17.849 12.843,16.508 12.843,15.177 13.52,14.5 16,14.5 16,18
  pour cut-out: 16.5,7.5 16.5,4.5 14,4.5 14.125,4.625 14.125,7.527
  pour cut-out: 30.5,15.5 28.5,15.5 28.5,22.5 30.5,22.5
  pour cut-out: 8.82,13.22 8.898,13.143 8.898,13.033 8.165,12.3 7.1,12.3 7.1,12.868 7.4,13.4
  pour cut-out: 34.5,15.596 34.5,13.2 33.7,13.2 33.5,13.4 33.5,15.6
  pour cut-out: 26.796,21.627 26.936,21.767 27.562,21.767 27.851,21.477 27.827,21.453 27.827,21.127 26.9,21.3 26.9,21.35 26.7,21.35 26.7,21.531 26.7,21.35 26.7,21.627
  pour cut-out: 23.42,5.885 22.746,5.211 21.686,5.211 21.686,4.924 22.815,3.795 23.7,3.795 23.7,5.749 23.62,5.829
  pour cut-out: 6.224,11.11 6.15,11.11 6.033,10.994 6.033,9.6 5.65,7.4 5.65,5.5 7.424,5.5 7.9,5.976 7.9,9.127 7.427,9.6 6.575,9.6 6.575,10.986
  pour cut-out: 11.35,4.725 11.35,10.725 11.625,11 14.425,11 14.425,5.9 13.25,4.725
  pour cut-out: 22.425,5.5 12.6,5.5 12.6,0.5 22.425,0.5
  pour cut-out: 30.6,6.6 26.15,6.6 25.375,7.375 28.525,10.525 30.6,10.525
  pour cut-out: 11.81,4.3 10.292,2.783 10.292,2.414 ccw(c10.79,2.414) 10.438,2.062 11.097,1.403 ccw(c11.346,1.652) 11.346,1.3 12.846,1.3 12.846,3.854 12.4,4.3
Solder Side:
  pour cut-out: 17.1,9.9 17.17,9.83 19.277,9.83 19.277,6.921 19.325,6.873 17.175,6.873
  pour cut-out: 9.543,13.267 10.614,13.267 10.614,13.253 11.067,12.8 11.067,11.989 10.887,11.81 9.813,11.81
  pour cut-out: 28.1,4.4 28.1,1.65 27.15,1.65 26.9,1.4 26.9,0.5 12.8,0.5 12.875,0.575 12.875,4.175 13.1,4.4
  pour cut-out: 1.17,17.5 6.87,17.5 6.85,17.48 6.85,12.5 1.15,12.5
  pour cut-out: 11.31,21.3 11.3,21.29 11.3,18.2 7.733,18.2 7.697,18.237 7.697,21.333
  pour cut-out: 31.642,18.5 31.642,11.77 26.334,6.462 30.627,6.462 30.627,6.485 32.092,7.95 32.76,7.283 34.5,7.283 34.5,18.5 33.072,18.5 31.642,19.93
  pour cut-out: 12.875,4.4 12.846,4.429 12.846,9.15 16.525,4.4
  pour cut-out: 24.2,13.308 24.2,15.817 21.308,15.817 21.3,15.825 21.3,13.3
  pour cut-out: 11.21,13.935 11.558,13.933 13.3,15.675 14.819,15.675 15.019,15.875 13.15,15.875
  pour cut-out: 17.625,16 17.6,16.025 16.725,16.025 16.725,17 17.625,17
  pour cut-out: 17.267,18 15.475,18 15.15,17.675 15.15,16.012 15.743,16.012 17.132,17.401
Power Plane (plane layer: these items are gaps in the copper):
  lines w0.254: 8.636,0 8.636,6.096 19.304,6.096 19.304,10.414 21.082,10.414 21.082,-0.076

## Silkscreen, mask and mechanical layers (free items; w line width, h text height)
Bottom Overlay:
  lines w0.203: 12,2.5 12,27.5
  text "GND" at 22,27.6 h0.8
  text "CAN" at 11.5,26.6 h0.8
  text "3V3" at 18.2,25.6 h0.8
  text "MSXII CONTROLLER BOARD / REV 4.1" at 33.548,24.827 h0.9 r90
  text "SWDIO" at 19.4,20.3 h0.8 r90
  text "SWCLK" at 20.6,20.3 h0.8 r90
  text "TX" at 21.9,20.3 h0.8 r90
  text "RX" at 23.2,20.3 h0.8 r90
  text "nRST" at 24.5,20.3 h0.8 r90
  text "VDDA" at 11.227,0.991 h0.8